# EAGLE board nRF52 Display (EAGLE 9.5.0)
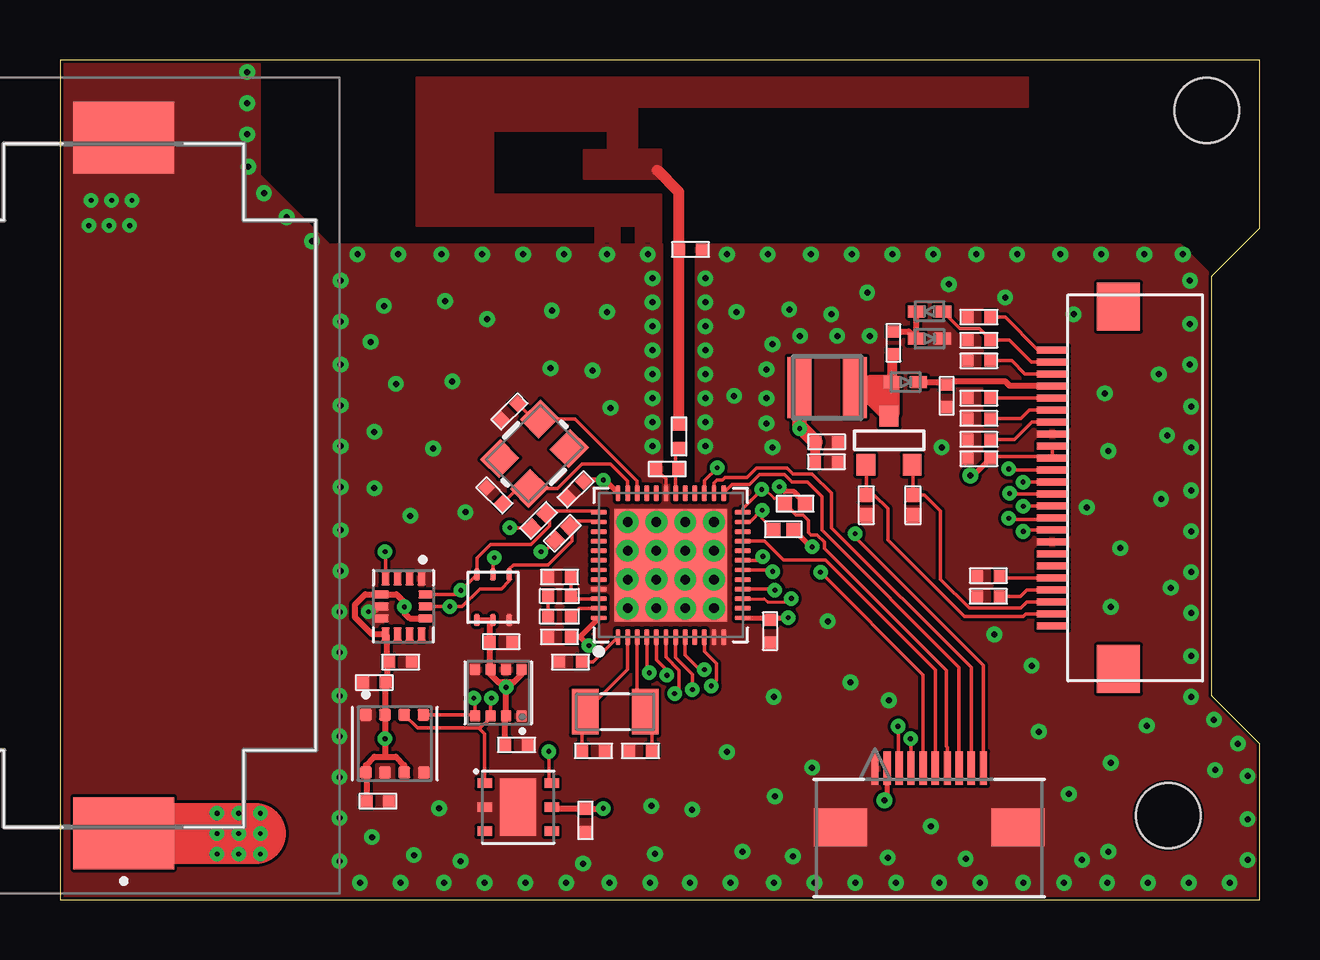
[diagram p0: board, top side]
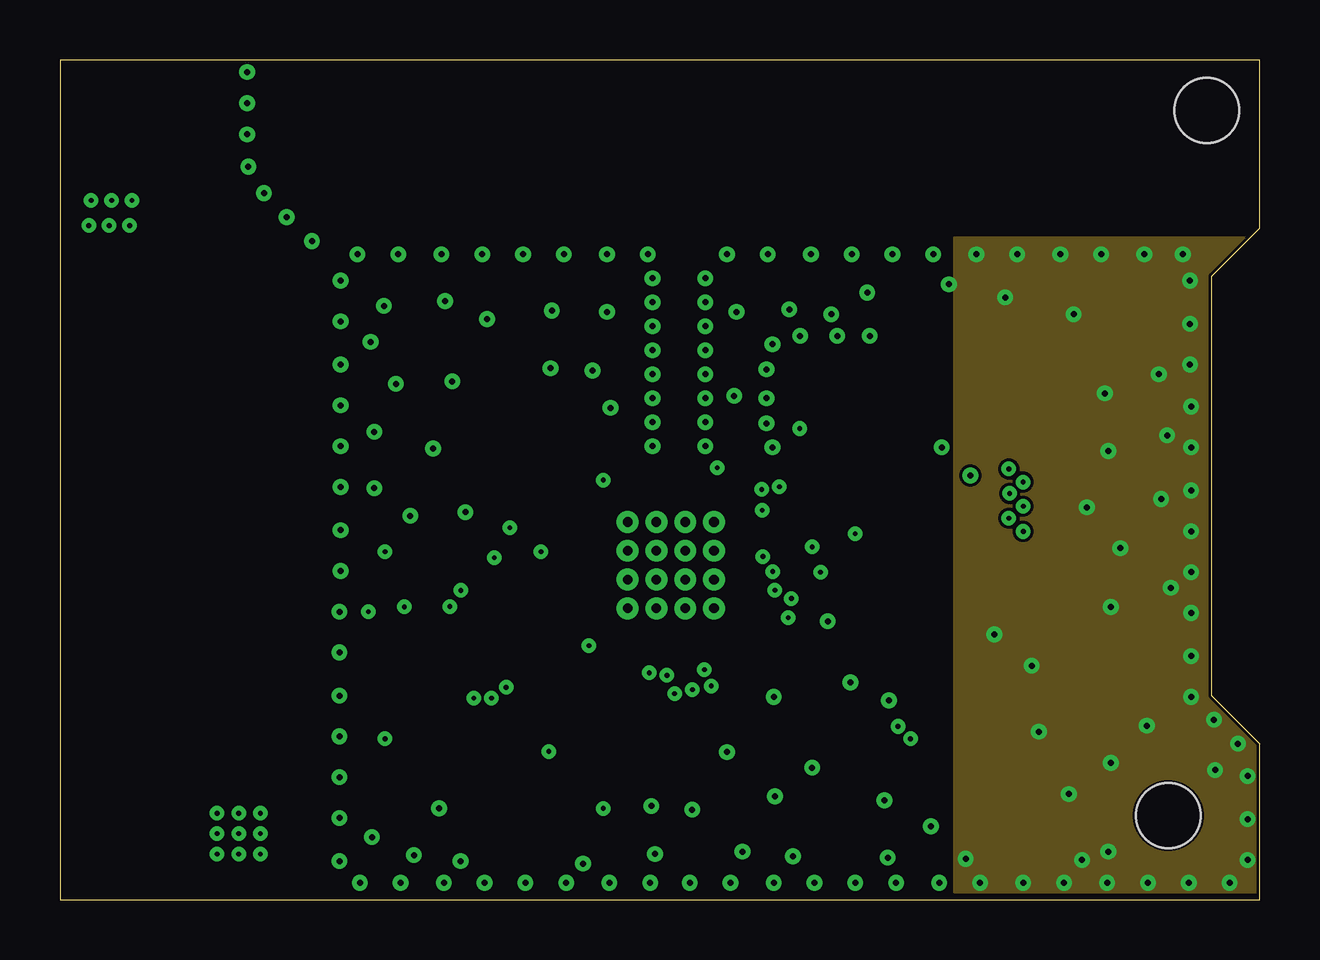
[diagram p1: board, inner layer Route2]
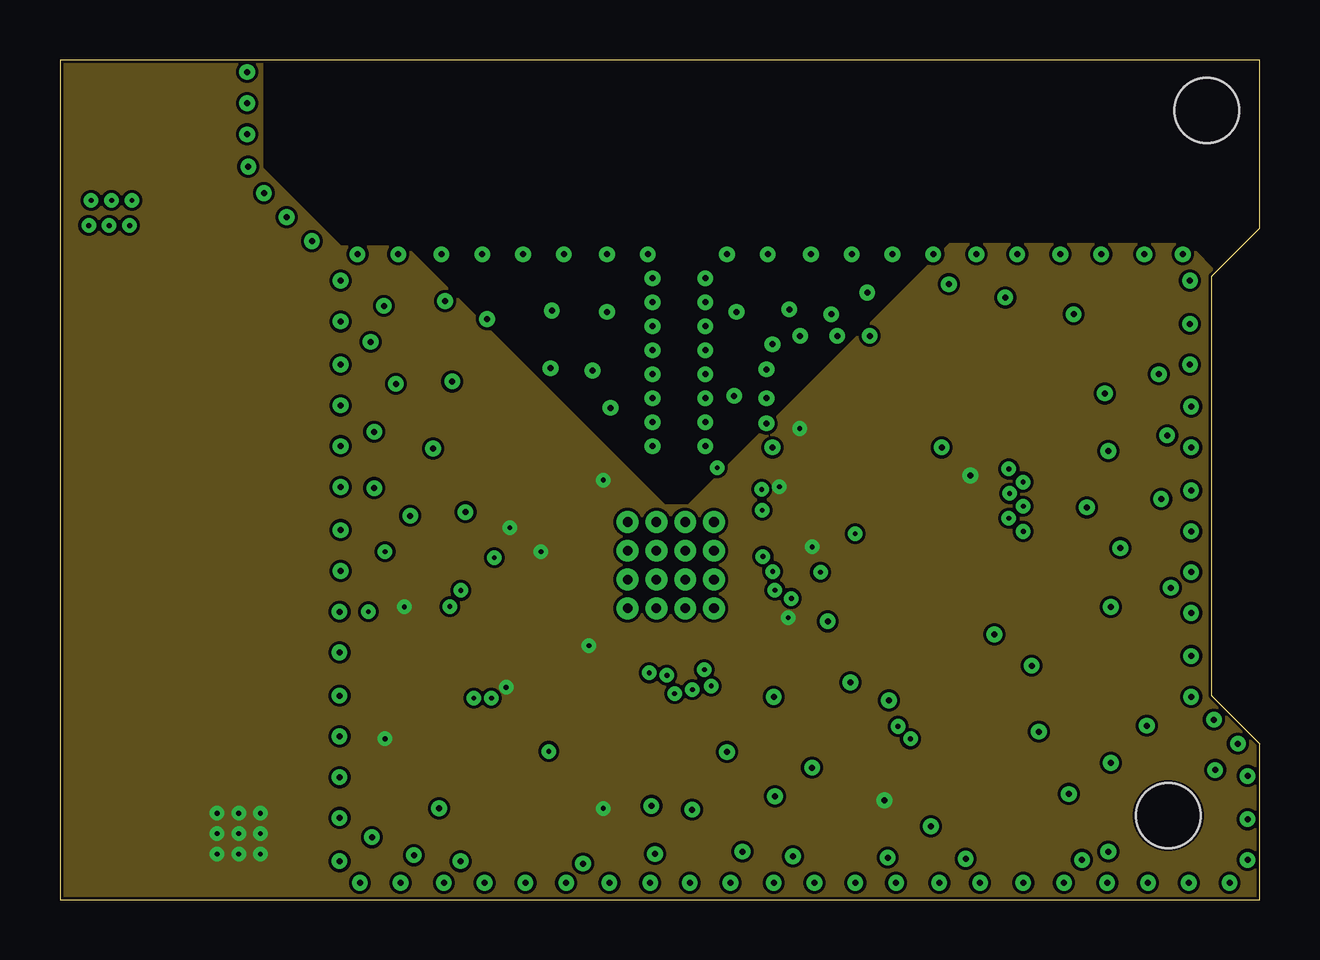
[diagram p2: board, inner layer Route15]
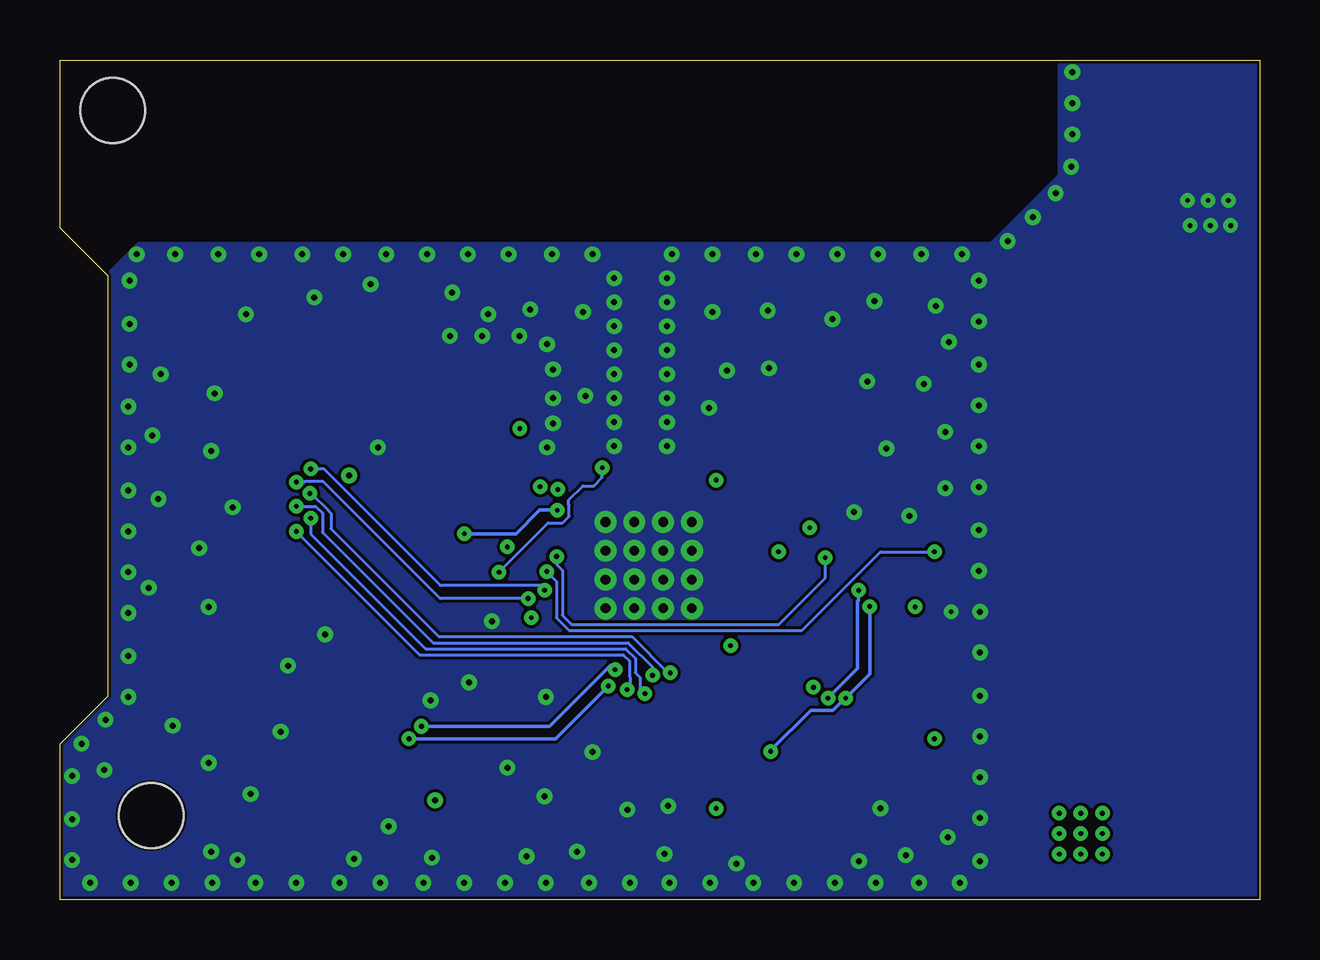
[diagram p3: board, bottom side, seen from below]

Size 50 x 35 mm. Coordinates in mm from the lower left corner, seen from the top.
Outline: 0,0 50,0 50,6.5 48,8.5 48,26 50,28 50,35 0,35 0,0
Copper layers (1+2*15+16): Top 0.035mm / dielectric 1.5mm / Route2 0.035mm / dielectric 0.15mm / Route15 0.035mm / dielectric 0.2mm / Bottom 0.035mm
Design rules "default *": minimum track width 5mil, minimum drill 0.2mm, track to track 5mil, track to pad 5mil, pad to pad 5mil, via to via 5mil, smd to smd 5mil, copper to edge 5mil, drill to drill 5mil, minimum pad ring 10mil, minimum via ring 8mil, stop-mask expansion 0mil, vias tented up to drill 40mil, thermal gap 0mil
Holes 2.7 mm at 46.2,3.5 47.8,32.9
tRestrict: area 25.1,17.4 to 26.4,27.4

## Footprints (pad centres in the part's own frame; a part is rotated, then mirrored left to right if it is on the bottom)
C0402 = smd 0.5 x 0.5: 1 -0.475,0; 2 0.475,0
SOD523 = smd 0.7 x 0.5: 1 0.55,0; 2 -0.55,0
687124149022 = smd 0.3 x 1.3: 1 -5.75,0; 2 -5.25,0; 3 -4.75,0; 4 -4.25,0; 5 -3.75,0; 6 -3.25,0; 7 -2.75,0; 8 -2.25,0; 9 -1.75,0; 10 -1.25,0; 11 -0.75,0; 12 -0.25,0; 13 0.25,0; 14 0.75,0; 15 1.25,0; 16 1.75,0; 17 2.25,0; 18 2.75,0; 19 3.25,0; 20 3.75,0; 21 4.25,0; 22 4.75,0; 23 5.25,0; 24 5.75,0 | smd 2 x 1.8: Z1 -7.55,-2.75; Z2 7.55,-2.75
INDC0402X26N = smd 0.5 x 0.5: 1 -0.732,0; 2 0.232,0
SM-NE29 = smd 1 x 2.54: 1 -1.15,0; 2 1.15,0
R0402 = smd 0.6 x 0.55: 1 -0.425,0; 2 0.425,0
SOT-23 = smd 0.787 x 0.889: 1 0.025,-1.016; 2 -0.94,1.016; 3 0.991,1.016
CR2032BS61 = smd 4.2 x 3: 1 0,14.5; 2 0,-14.5
PSON65P250X250X100-8N = smd 0.49 x 0.45: 1 0.97,0.975; 2 0.97,0.325; 3 0.97,-0.325; 4 0.97,-0.975; 5 -0.97,-0.975; 6 -0.97,-0.325; 7 -0.97,0.325; 8 -0.97,0.975
DFN300X300X110-7N = smd 0.6 x 0.4: 1 -1.4,1; 2 -1.4,0; 3 -1.4,-1; 4 1.4,-1; 5 1.4,0; 6 1.4,1 | smd 1.5 x 2.4: 7 0,0
MOLEX_52892-1095 = smd 0.305 x 1.397: 1 2.261,2.896; 2 1.753,2.896; 3 1.245,2.896; 4 0.762,2.896; 5 0.254,2.896; 6 -0.254,2.896; 7 -0.762,2.896; 8 -1.245,2.896; 9 -1.753,2.896; 10 -2.261,2.896 | smd 2.21 x 1.6: 11 -3.702,5.359; 12 3.702,5.359
PSON80P300X300X100-8N = smd 0.5 x 0.5: 1 1.2,1.2; 2 1.2,0.4; 3 1.2,-0.4; 4 1.2,-1.2; 5 -1.2,-1.22; 6 -1.2,-0.4; 7 -1.2,0.4; 8 -1.2,1.2
PQFN50P300X250X88-14N = smd 0.59 x 0.35: 1 -1.165,0.75; 2 -1.165,0.25; 3 -1.165,-0.25; 4 -1.165,-0.75; 8 1.165,-0.75; 9 1.165,-0.25; 10 1.165,0.25; 11 1.165,0.75 | smd 0.35 x 0.59: 5 -0.5,-0.915; 6 0,-0.915; 7 0.5,-0.915; 12 0.5,0.915; 13 0,0.915; 14 -0.5,0.915
QFN40P600X600X90-48_N = smd 0.65 x 0.2: 1 -3,2.2; 2 -3,1.8; 3 -3,1.4; 4 -3,1; 5 -3,0.6; 6 -3,0.2; 7 -3,-0.2; 8 -3,-0.6; 9 -3,-1; 10 -3,-1.4; 11 -3,-1.8; 12 -3,-2.2; 25 3,-2.2; 26 3,-1.8; 27 3,-1.4; 28 3,-1; 29 3,-0.6; 30 3,-0.2; 31 3,0.2; 32 3,0.6; 33 3,1; 34 3,1.4; 35 3,1.8; 36 3,2.2 | smd 0.2 x 0.65: 13 -2.2,-3; 14 -1.8,-3; 15 -1.4,-3; 16 -1,-3; 17 -0.6,-3; 18 -0.2,-3; 19 0.2,-3; 20 0.6,-3; 21 1,-3; 22 1.4,-3; 23 1.8,-3; 24 2.2,-3; 37 2.2,3; 38 1.8,3; 39 1.4,3; 40 1,3; 41 0.6,3; 42 0.2,3; 43 -0.2,3; 44 -0.6,3; 45 -1,3; 46 -1.4,3; 47 -1.8,3; 48 -2.2,3 | smd 4.7 x 4.7: PAD 0,0 | drill 0.4: PAD@VIA01 -1.8,1.8; PAD@VIA02 -1.8,0.6; PAD@VIA03 -1.8,-0.6; PAD@VIA04 -1.8,-1.8; PAD@VIA05 -0.6,1.8; PAD@VIA06 -0.6,0.6; PAD@VIA07 -0.6,-0.6; PAD@VIA08 -0.6,-1.8; PAD@VIA09 0.6,1.8; PAD@VIA10 0.6,0.6; PAD@VIA11 0.6,-0.6; PAD@VIA12 0.6,-1.8; PAD@VIA13 1.8,1.8; PAD@VIA14 1.8,0.6; PAD@VIA15 1.8,-0.6; PAD@VIA16 1.8,-1.8
TI-OPT3001 = smd 0.5 x 0.25: 1 -0.95,0.675; 2 -0.95,0; 3 -0.95,-0.675; 4 0.95,-0.675; 5 0.95,0; 6 0.95,0.675
ABS07-32.768KHZ-T = smd 1.1 x 1.9: 1 -1.25,0; 2 1.25,0
CRYSTAL-SMD-3.2X2.5MM = smd 1.2 x 1.1: 1 -1.175,-0.875; 2 1.175,-0.875; 3 1.175,0.875; 4 -1.175,0.875

## Placement (x,y rotation side)
C1  12pF  [C0402]  22.24,6.2 0 top
C2  12pF  [C0402]  24.2,6.2 180 top
C3  12p  [C0402]  18.11,16.85 135 top
C4  12p  [C0402]  18.73,20.35 225 top
C5  10u  [C0402]  21.28,9.9 0 top
C6  4.7u  [C0402]  21.49,17.1 45 top
C7  100n  [C0402]  31.95,18.25 180 top
C8  0.8p  [C0402]  25.31,17.95 0 top
C9  1.2p  [C0402]  26.28,27.1 180 top
C10  1u  [C0402]  20.82,13.45 180 top
C11  100n  [C0402]  29.6,11.19 90 top
C12  100n  [C0402]  14.2,9.9 180 top
C13  100n  [C0402]  18.39,10.75 180 top
C14  100u  [C0402]  19.03,6.45 180 top
C15  1u  [C0402]  38.3,24.28 0 top
C16  1u  [C0402]  38.3,23.32 0 top
C17  100n  [C0402]  20.82,10.95 180 top
C18  1u  [C0402]  38.3,22.46 0 top
C19  1u  [C0402]  38.3,20.9 0 top
C20  1u  [C0402]  38.3,20.06 0 top
C21  1u  [C0402]  38.3,19.18 0 top
C22  1u  [C0402]  36.96,21 270 top
C23  1u  [C0402]  38.3,18.38 0 top
C24  1u  [C0402]  38.7,12.64 0 top
C25  1u  [C0402]  38.7,13.5 0 top
C26  4.7u  [C0402]  31.96,19.08 0 top
C27  4.7u  [C0402]  34.74,23.21 270 top
C28  1u  [C0402]  13.25,4.1 0 top
C29  1u  [C0402]  13.1,9.05 180 top
C30  100n  [C0402]  21.9,3.3 270 top
D1  1PS79SB30,115  [SOD523]  36.25,24.52 180 top
D2  1PS79SB30,115  [SOD523]  36.24,23.38 0 top
D3  1PS79SB30,115  [SOD523]  35.24,21.57 0 top
K1  687124149022  [687124149022]  41.37,17.16 90 top
L1  3.9u  [INDC0402X26N]  25.8,19.56 90 top
L2  [SM-NE29]  31.98,21.35 0 top
L4  10u  [INDC0402X26N]  21.07,11.8 0 top
L5  15n  [INDC0402X26N]  20.57,12.65 180 top
R1  10K  [R0402]  30.64,16.5 0 top
R2  4.7k  [R0402]  19.95,15.8 225 top
R3  4.7k  [R0402]  20.94,15.27 225 top
R4  10K  [R0402]  30.15,15.43 0 top
R5  10k  [R0402]  33.61,16.44 90 top
R6  0.47  [R0402]  35.55,16.44 90 top
T1  [SOT-23]  34.58,19.14 180 top
U1  CR2032-BS-6-1  [CR2032BS61]  2.66,17.27 180 top
U2  BME280  [PSON65P250X250X100-8N]  18.27,8.62 270 top
U4  SHT20  [DFN300X300X110-7N]  19.1,3.85 0 top
U5  52892-1095  [MOLEX_52892-1095]  36.23,8.37 180 top
U6  BME680  [PSON80P300X300X100-8N]  13.95,6.5 90 top
U7  BMI160  [PQFN50P300X250X88-14N]  14.32,12.22 270 top
U$1  NRF52832  [QFN40P600X600X90-48_N]  25.46,13.94 90 top
U$2  TI-OPT3001  [TI-OPT3001]  18.05,12.6 90 top
X1  ABS07-32.768KHZ-T  [ABS07-32.768KHZ-T]  23.14,7.83 180 top
Y1  CRYSTAL-26MHZSMD-3.2X2.5  [CRYSTAL-SMD-3.2X2.5MM]  19.78,18.59 225 top

## Library data of the parts
C1-C30 = eagle-ltspice; SPICEMODEL: NONE; SPICEPREFIX: C
D1-D3 = 1PS79SB30_115; AVAILABILITY: Unavailable; DESCRIPTION: 1PS79SB30 Series 40 V 200 mA Surface Mount Schottky Barrier Diode - SOD-523; MF: Nexperia; MP: 1PS79SB30,115; PACKAGE: SOD-523 Nexperia; PRICE: None
K1 = 687124149022; AVAILABILITY: Unavailable; DESCRIPTION: FFC / FPC Board Connector, WR-FPC Series, Surface Mount, Receptacle, 24, Bottom, 0.5 mm; MF: Wurth Electronics; MP: 687124149022; PACKAGE: None; PRICE: None
L1 L4 L5 = MHQ0402P7N5JT000; AVAILABILITY: Unavailable; DESCRIPTION: FIXED IND 7.5NH 200MA 1.2 OHM; MF: TDK; MP: MHQ0402P7N5JT000; PACKAGE: 0402 TDK; PRICE: None
L2 = inductor-neosid; OC_FARNELL: unknown; OC_NEWARK: unknown
R1-R6 = eagle-ltspice; SPICEMODEL: NONE; SPICEPREFIX: R
T1 = zetex; OC_FARNELL: unknown; OC_NEWARK: unknown
U1 = CR2032-BS-6-1; DESCRIPTION: Battery Holders, Clips & Contacts SMD RoHS; HEIGHT: 6mm; MANUFACTURER_NAME: Q&J; MANUFACTURER_PART_NUMBER: CR2032-BS-6-1
U2 = BME280; AVAILABILITY: Unavailable; DESCRIPTION: Integrated pressure, humidity and temperature sensor; 8-pin 2.5x2.5x0.93mm LGA; MF: Bosch; MP: BME280; PACKAGE: LGA-8 Bosch; PRICE: None
U4 = SHT20; AVAILABILITY: Unavailable; DESCRIPTION: SHT20 3.6 V -40 to +125°C Fully Calibrated Digital Humidity & Temperature Sensor; MF: Sensirion AG; MP: SHT20; PACKAGE: DFN-6 Sensirion; PRICE: None
U5 = 52892-1095; AVAILABILITY: Unavailable; DESCRIPTION: Socket, r/a, Fpc, Zif, Smt, 10way; MF: Molex; MP: 52892-1095; PACKAGE: None; PRICE: None
U6 = BME680; AVAILABILITY: Unavailable; DESCRIPTION: Integrated Environmental Unit; MF: Bosch Sensortec; MP: BME680; PACKAGE: LGA-8 Bosch Tools; PRICE: None
U7 = BMI160; AVAILABILITY: Unavailable; DESCRIPTION: BMI160 2.5 x 3 mm Tiaxial Accelerometer / Gyroscope Inertial Measurement Unit; MF: Bosch; MP: BMI160; PACKAGE: LGA-14 Bosch; PRICE: None
U$1 = Nordic_nRF
U$2 = FaBo-Mems
X1 = Crystals; CREATED_BY: PCBLayout.com; DIGIKEY_PART_NUMBER: 535-9542-2-ND; MANUFACTURER: Abracon LLC; MPN: ABS07-32.768KHZ-T; PACKAGE: SMD-2
Y1 = SparkFun-Clocks; PROD_ID: XTAL-12454

## Nets
BUSY: K1.9 U$1.7
CS: K1.12 U$1.4
D/C: K1.11 U$1.5
DFU: R4.1 U5.10 U$1.23
FRST: U5.5 U$1.27
GDR: K1.2 R5.2 T1.3
GND: C1.2 C2.2 C3.2 C4.2 C5.1 C6.1 C7.1 C8.1 C9.1 C10.2 C11.1 C12.1 C13.1 C14.1 C15.1 C16.1 C17.2 C18.1 C19.1 C20.1 C21.1 C22.2 C23.1 C24.1 C25.1 C26.2 C28.2 C29.2 C30.2 D2.1 K1.8 K1.17 R5.1 R6.1 U1.2 U2.1 U2.5 U2.7 U4.2 U4.7 U5.1 U5.11 U5.12 U6.1 U6.5 U6.7 U7.1 U7.6 U7.7 U$1.11 U$1.12 U$1.31 U$1.45 U$1.PAD U$1.PAD@VIA01 U$1.PAD@VIA02 U$1.PAD@VIA03 U$1.PAD@VIA04 U$1.PAD@VIA05 U$1.PAD@VIA06 U$1.PAD@VIA07 U$1.PAD@VIA08 U$1.PAD@VIA09 U$1.PAD@VIA10 U$1.PAD@VIA11 U$1.PAD@VIA12 U$1.PAD@VIA13 U$1.PAD@VIA14 U$1.PAD@VIA15 U$1.PAD@VIA16 U$2.3
INT_BMI: U7.4 U$1.18
INT_OPT: U$1.19 U$2.5
MISO: U$1.17
MOSI: K1.14 U$1.16
N$1: C1.1 U$1.2 X1.2
N$2: C2.1 U$1.3 X1.1
N$3: C3.1 U$1.35 Y1.3
N$4: C4.1 U$1.34 Y1.1
N$5: C5.2 U$1.1
N$6: C8.2 L1.1 U$1.30
N$7: C27.2 D3.2 L2.2 T1.1
N$8: C21.2 K1.18
N$9: L4.2 U$1.47
N$10: L4.1 L5.2
N$11: C10.1 L5.1 U$1.46
N$12: C18.2 K1.22
N$13: C20.2 K1.19
N$14: C19.2 K1.20
N$16: C15.2 K1.24
N$19: C24.2 K1.4
N$20: C25.2 K1.5
N$22: C27.1 D1.1 D2.2
NRESET: R1.1 U5.7 U$1.24
PREVGH: C22.1 D3.1 K1.21
PREVGL: C16.2 D1.2 K1.23
RES: K1.10 U$1.6
RESE: K1.3 R6.2 T1.2
RF: C9.2 L1.2
RX: U5.4 U$1.10
SCK: K1.13 U$1.15
SCL: R3.1 U2.4 U4.6 U6.4 U7.13 U$1.38 U$2.4
SDA: R2.1 U2.3 U4.1 U6.3 U7.14 U$1.37 U$2.6
SWDCLK: U5.8 U$1.25
SWDIO: U5.9 U$1.26
SWO: U5.6 U$1.21
TX: U5.3 U$1.8
VDD: C6.2 C7.2 C11.2 C12.2 C13.2 C14.2 C17.1 C23.2 C26.1 C28.1 C29.1 C30.1 K1.15 K1.16 L2.1 R1.2 R2.2 R3.2 R4.2 U1.1 U2.2 U2.6 U2.8 U4.5 U5.2 U6.2 U6.6 U6.8 U7.5 U7.8 U7.12 U$1.13 U$1.36 U$1.48 U$2.1 U$2.2

## Tracks (layer width: path | path; a pad name or v marks a point on that pad's centre or on a via)
BUSY  (via drill 0.2)
  Top 0.15: U$1.7 25.66,10.1 26.36,9.4 v26.36,8.75 | K1.9 40.22,15.41 v40.15,15.35
  Bottom 0.127: v26.36,8.75 26.25,8.86 26.25,9.29 26.27,9.31 26.27,9.94 26.53,10.2 35.01,10.2 v40.15,15.35
CS  (via drill 0.2)
  Top 0.15: U$1.4 24.46,9.56 v24.57,9.45 | K1.12 39.61,16.9 v39.58,16.93
  Bottom 0.127: v39.58,16.93 39.52,16.93 38.8,16.21 38.8,16.2 38.7,16.1 38.7,15.45 34.21,10.96 26.16,10.96 24.65,9.45 v24.57,9.45
D/C  (via drill 0.2)
  Top 0.15: U$1.5 24.86,9.99 25.3,9.55 v25.3,9.35 | K1.11 40.17,16.41 v40.15,16.39
  Bottom 0.127: v25.3,9.35 25.3,9.69 26.32,10.71 34.46,10.71 39.06,15.31 39.06,16.11 39.35,16.39 v40.15,16.39
DFU  (via drill 0.2)
  Top 0.127: R4.1 29.27,15.89 v29.27,16.23
  Top 0.15: U$1.23 28.75,15.74 29.25,16.23 v29.27,16.23 | v33.15,15.25 33.15,15.1 38.49,9.76 U5.10
  Bottom 0.15: v33.15,15.25 31,15.25 30.02,16.23 v29.27,16.23
FRST  (via drill 0.2)
  Top 0.15: U$1.27 26.86,17.46 v27.4,18 | v31.7,13.65 35.98,9.37 U5.5
  Bottom 0.127: v31.7,13.65 29.65,15.7 29.05,15.7 28.77,15.98 28.77,16.44 28.8,16.46 28.8,16.65 28.2,17.25 27.75,17.25 27.4,17.6 v27.4,18
GDR
  Top 0.15: T1.3 33.61,18.1 R5.2 33.94,16.87 34.5,16.3 34.5,15 37.7,11.8 40.15,11.8 40.26,11.91 K1.2
GND  (via drill 0.2, 0.25)
  Top 0.127: U$1.PAD@VIA10 U$1.PAD@VIA14 | U$1.PAD 25.46,15.14 U$1.PAD@VIA15 | U$1.PAD@VIA11 U$1.PAD@VIA16 | U$1.PAD@VIA11 U$1.PAD@VIA12 | U$1.PAD U$1.PAD@VIA11 | U$1.PAD U$1.PAD@VIA10 | U$1.PAD@VIA10 U$1.PAD@VIA09 | U$1.PAD 24.26,13.94 U$1.PAD@VIA05 | U$1.PAD U$1.PAD@VIA06 | U$1.PAD 26.66,13.94 U$1.PAD@VIA08 | U$1.PAD@VIA07 U$1.PAD@VIA04 | U$1.PAD U$1.PAD@VIA07 | U$1.PAD@VIA07 U$1.PAD@VIA03 | U$1.PAD 25.46,12.74 U$1.PAD@VIA02 | U$1.PAD U$1.PAD@VIA01 | U7.6 13.19,12 v12.85,12
  Top 0.15: U$1.31 25.26,17.53 C8.1
  other vias: 22.8,26.9 24.5,26.9 15.9,26.9 17.6,26.9 12.4,26.9 14.1,26.9 19.3,26.9 21,26.9 43.4,26.9 41.7,26.9 45.2,26.9 38.2,26.9 39.9,26.9 31.3,26.9 33,26.9 27.8,26.9 29.5,26.9 34.7,26.9 36.4,26.9 24.7,25.9 24.7,24.9 24.7,23.9 24.7,22.9 24.7,21.9 24.7,20.9 24.7,19.9 24.7,18.9 26.9,24.9 26.9,23.9 26.9,22.9 26.9,21.9 26.9,20.9 26.9,19.9 26.9,18.9 26.9,25.9 16.7,1.6 14.75,1.85 13,2.6 15.8,3.8 21.8,1.5 24.8,1.9 26.35,3.75 24.65,3.9 27.8,6.15 29.8,4.3 28.45,2 34.5,1.75 30.55,1.8 31.35,5.5 36.3,3.05 42.6,1.65 37.75,1.7 34.55,8.3 29.75,8.45 32.95,9.05 43.7,2 48.15,5.4 42.05,4.4 43.8,5.7 45.3,7.25 48.1,7.5 40.8,7 38.95,11.05 43.8,12.2 40.5,9.75 46.8,26.9 46.3,13 44.2,14.65 42.8,16.35 45.9,16.7 32,11.6 36.75,18.85 29.7,18.85 28.1,21 43.7,18.7 46.15,19.35 43.55,21.1 45.8,21.9 42.25,24.4 39.4,25.1 37.05,25.65 33.65,25.3 32.15,24.4 30.4,24.6 28.2,24.5 14.6,16 16.9,16.15 13.1,17.15 15.55,18.8 13.1,19.5 16.35,21.6 22.95,20.5 22.2,22.05 20.45,22.15 22.8,24.5 20.5,24.55 17.8,24.2 16.05,24.95 13.5,24.75 14,21.5 12.95,23.25 1.3,29.15 2.15,29.15 3,29.15 1.2,28.1 2.05,28.1 2.9,28.1 7.8,34.5 7.8,33.2 7.8,31.9 7.85,30.55 10.5,27.45 9.45,28.45 8.5,29.45 11.65,10.3 11.65,12 11.65,3.4 11.65,5.1 11.65,1.6 11.65,6.8 11.65,8.5 11.7,24.1 11.7,25.8 11.7,17.2 11.7,18.9 11.7,13.7 11.7,15.4 11.7,20.6 11.7,22.3 43.65,0.7 45.35,0.7 40.15,0.7 41.85,0.7 47.05,0.7 48.75,0.7 36.65,0.7 38.35,0.7 29.75,0.7 31.45,0.7 26.25,0.7 27.95,0.7 33.15,0.7 34.85,0.7 22.9,0.7 24.6,0.7 16,0.7 17.7,0.7 12.5,0.7 14.2,0.7 19.4,0.7 21.1,0.7 49.1,6.5 49.5,5.15 49.5,1.65 49.5,3.35 47.15,18.85 47.15,20.55 47.15,11.95 47.15,13.65 47.15,8.45 47.15,10.15 47.15,15.35 47.15,17.05 47.1,25.8 47.1,22.3 47.1,24 29.45,19.85 29.45,20.9 29.45,22.1 29.7,23.15 30.85,23.5 32.4,23.5 33.75,23.5
  pour Top: 11.3,27.3 46.7,27.3 48,26 48,8.6 50.1,6.5 50.1,0 11.3,0
  pour Route2: 37.3,27.6 72.7,27.6 74,26.3 74,8.9 76.1,6.8 76.1,0.3 37.3,0.3
  pour Top: 11.6,26.9 8.3,30.2 8.3,34.95 -1.15,34.95 -1.15,0.05 11.35,0.05 11.6,0.3
  pour Bottom: 50.05,0.15 -1.1,0.15 -1.1,34.95 8.35,34.95 8.35,30.2 11.2,27.35 46.75,27.35 48,26.1 48,8.6 50.05,6.55
INT_BMI  (via drill 0.2)
  Top 0.15: U7.4 13.57,14.48 v13.55,14.5 | U$1.18 29.65,13.74 v29.71,13.68
  Bottom 0.127: v13.55,14.5 15.8,14.5 19.08,11.22 28.77,11.22 29.31,11.75 29.31,13.27 v29.71,13.68
INT_OPT  (via drill 0.2)
  Top 0.15: U$2.5 18.05,14.2 v18.1,14.25 | U$1.19 29.14,14.14 v29.3,14.3
  Bottom 0.127: v29.3,14.3 29.3,13.96 29.05,13.71 29.05,11.85 28.67,11.47 20.03,11.47 18.1,13.4 v18.1,14.25
MOSI  (via drill 0.2)
  Top 0.15: U$1.16 29.8,12.94 v29.8,12.9 | K1.14 39.59,17.91 v39.55,17.95
  Bottom 0.127: v29.8,12.9 29.8,13.02 29.88,13.09 34.14,13.09 39,17.95 v39.55,17.95
N$1
  Top 0.15: U$1.2 23.66,9.6 X1.2 21.75,7.69 21.75,7.45 21.77,7.43 C1.1
N$2
  Top 0.15: U$1.3 24.06,8.16 X1.1 24.68,7.54 C2.1
N$3
  Top 0.15: U$1.35 23.66,17.44 22.95,18.15 21.75,18.15 20.74,17.14 Y1.3
  Top 0.152: Y1.3 19.07,17.14 C3.1
N$4
  Top 0.15: U$1.34 24.05,17.45 21.46,20.04 Y1.1
  Top 0.152: Y1.1 19.71,20.04 C4.1
N$5
  Top 0.15: C5.2 22.22,9.9 U$1.1
N$6
  Top 0.15: L1.1 25.65,18.68 25.65,18.09 C8.2 25.66,17.82 U$1.30
N$7
  Top 0.406: 34.69,20.29 T1.1 | D3.2 34.69,22.69 C27.2
  Top 0.61: T1.1 33.46,21.25 33.56,21.35 | 33.56,21.35 L2.2 | 33.82,21.57 D3.2 34.69,20.7 | 33.56,21.35 33.78,21.57 33.82,21.57 | 34.69,20.7 34.69,20.29 | 34.69,20.7 33.82,21.57
N$8
  Top 0.15: C21.2 39.78,19.18 40.51,19.91 K1.18
N$9
  Top 0.15: L4.2 21.64,12.14 U$1.47
N$10
  Top 0.15: L4.1 L5.2
N$11
  Top 0.15: U$1.46 21.41,12.54 L5.1 C10.1
N$12
  Top 0.15: C18.2 39.67,22.46 40.23,21.91 K1.22
N$13
  Top 0.15: K1.19 40.41,20.41 40.06,20.06 C20.2
N$14
  Top 0.15: C19.2 K1.20
N$16
  Top 0.15: K1.24 40.77,22.91 39.4,24.28 C15.2
N$19
  Top 0.15: C24.2 40.04,12.64 40.31,12.91 K1.4
N$20
  Top 0.15: K1.5 39.27,13.41 C25.2
N$22
  Top 0.254: C27.1 35.38,23.69 D2.2 D1.1
NRESET  (via drill 0.2)
  Top 0.127: R1.1 30,16.71 29.78,16.71 29.39,17.1 v29.25,17.1
  Top 0.15: v29.25,17.1 28.46,16.31 U$1.24 | 36.95,5.52 U5.7 36.99,6.34 36.95,6.39 36.95,9.56 31.85,14.65 31.85,14.91 31.56,15.21 31.3,15.21 31.2,15.3 31.2,15.8 30.98,16.02 30.68,16.02 30.56,16.14 30.56,16.15 R1.1
PREVGH
  Top 0.254: K1.21 39.59,21.41 39.4,21.6 37.09,21.6 37.05,21.57 | 37.05,21.57 C22.1 | D3.1 37.05,21.57
PREVGL
  Top 0.15: C16.2 38.8,23.32 | 38.8,23.32 39.58,23.32 40.49,22.41 K1.23 | D1.2 37.37,23.95 37.52,23.8 38.32,23.8 38.8,23.32
RES  (via drill 0.2)
  Top 0.15: v25.62,8.58 25.8,8.77 25.8,9.56 25.26,10.11 U$1.6 | K1.10 41.36,15.86 41.35,15.85 39.6,15.85 v39.55,15.9
  Bottom 0.127: v39.55,15.9 39.55,15.25 34.75,10.45 26.42,10.45 26.01,10.04 26.01,9.45 25.82,9.25 25.82,8.78 v25.62,8.58
RESE
  Top 0.15: T1.2 35.55,18.09 R6.2 36.03,16.87 36.7,16.2 36.7,13.35 37.9,12.15 40.05,12.15 40.31,12.41 K1.3
RF
  Top 0.127: 25.8,26.6 C9.2
  Top 0.46: 24.9,30.4 25.8,29.5 25.8,26.6 L1.2
  pour Top: 14.87,28.1 14.87,34.27 40.35,34.27 40.35,33.06 24.05,33.06 24.05,31.26 25.06,31.26 25.06,30.05 21.84,30.05 21.84,31.25 22.85,31.25 22.85,32.06 18.05,32.06 18.05,29.39 25.05,29.39 25.05,27.36 24.01,27.36 24.01,28.1 23.32,28.1 23.32,27.36 22.33,27.36 22.33,28.1
RX  (via drill 0.2)
  Top 0.15: U$1.10 26.86,10.35 27.37,9.84 27.37,9.13 v27.14,8.9 | U5.4 35.47,6.68 v35.45,6.7
  Bottom 0.15: v35.45,6.7 29.34,6.7 v27.14,8.9
SCK  (via drill 0.2)
  Top 0.127: U$1.15 29.36,12.54 29.5,12.41 30.48,12.41
  Top 0.15: 30.48,12.41 v30.48,12.55 | K1.13 v40.14,17.41
  Bottom 0.127: v30.48,12.55 34.15,12.55 39.02,17.42 39.78,17.42 39.8,17.41 v40.14,17.41
SCL  (via drill 0.2)
  Top 0.15: U$1.38 22.41,15.79 21.51,15.79 21.29,15.57 | 21.29,15.57 21.24,15.52 21.35,15.41 21.35,14.95 20.35,13.95 18.9,13.95 18.73,13.78 U$2.4 18.73,13.28 18.4,12.95 17.5,12.95 16.77,12.22 v16.25,12.22 | 21.29,15.57 R3.1 | v17.25,8.4 17.3,8.36 U2.4 17.25,7.7 U6.4 | v20.38,6.17 20.38,4.97 U4.6 | v16.25,12.22 U7.13 v16.25,12.22 v16.25,12.21 v16.25,12.22
  Bottom 0.15: v16.25,12.21 16.25,9.4 v17.25,8.4 17.27,8.4 17.77,7.89 18.7,7.89 20.4,6.2 v20.38,6.17
SDA  (via drill 0.2)
  Top 0.15: U$1.37 22.41,16.19 20.34,16.19 R2.1 20.4,15.95 20.4,15.56 19.64,14.81 17.94,14.81 17.38,14.24 U$2.6 v16.71,12.89 16.55,12.72 U7.14 | v17.98,8.4 17.95,8.36 U2.3 17.95,7.58 17.52,7.15 17.45,7.15 | U6.3 14.9,7.15 17.45,7.15 | U4.1 17.7,6.9 17.45,7.15
  Bottom 0.15: v16.71,12.89 16.71,12.47 16.75,12.42 16.75,9.63 v17.98,8.4
SWDCLK
  Top 0.15: U$1.25 28.02,17.3 28.73,17.3 29.15,17.71 30.19,17.71 30.5,17.4 31.15,17.4 31.75,16.8 31.75,15.41 37.48,9.68 U5.8
SWDIO
  Top 0.15: U$1.26 27.26,17.36 27.39,17.5 27.61,17.5 27.71,17.6 28.64,17.6 29.03,17.99 30.31,17.99 30.55,17.75 31.35,17.75 32.15,16.95 32.15,15.5 37.98,9.67 U5.9
SWO
  Top 0.15: U5.6 36.48,9.58 31.91,14.16 30.16,14.16 29.36,14.95 U$1.21
TX  (via drill 0.2)
  Top 0.15: U$1.8 26.06,10.19 26.66,9.59 v26.86,9.59 | U5.3 34.95,5.51 34.95,7.21 v34.93,7.22
  Bottom 0.15: v26.86,9.59 26.86,9.74 26.88,9.76 27.05,9.76 29.59,7.22 v34.93,7.22
VDD  (via drill 0.2, 0.25)
  Top 0.15: C23.2 38.85,18.46 41.32,18.46 K1.15 K1.16 | R3.2 20.17,14.5 v20.05,14.5 | R2.2 v18.75,15.5 | v8.35,2.75 8.15,2.75
  Top 0.2: U5.2 34.48,4.39 34.37,4.28 v34.37,4.13 | U$2.2 U$2.1
  Top 0.203: U$1.36 22.71,17.49 v22.65,17.49 21.88,17.49 C6.2 | U$1.13 29.52,11.74 C11.2 29.68,11.75 v30.35,11.75 | R4.2 31.3,14.7 v31.35,14.7 | v29.98,17.21 30.18,17 30.61,17 30.74,16.87 30.74,16.82 R1.2 | C17.1 21.67,10.95 | U$1.48 21.67,10.95 | 21.67,10.95 21.68,10.95 v22.05,10.58 | C23.2 38.07,17.68 v37.95,17.68
  Top 0.254: U$2.2 17.91,11.52 C13.2 17.91,9.62 U2.6 17.89,9.54 17.89,9.44 18.29,9.05 18.6,9.05 | U2.8 19.25,9.4 18.9,9.05 18.6,9.05 | 18.6,9.05 18.59,9.04 v18.59,8.85 U2.2 18.55,7.61 C14.2 | U4.5 20.57,3.77 C30.1 22.62,3.77 v22.65,3.8 | C28.1 12.78,5.27 U6.8 12.75,5.6 13.1,5.95 13.55,5.95 | 13.55,5.95 14,5.95 14.35,5.6 U6.6 | U7.12 14.58,11.72 14.35,11.95 v14.35,12.2 14.35,12.4 14.03,12.72 U7.5 12.72,12.72 12.29,12.29 12.29,11.77 13.01,11.06 U7.8 13.62,11.01 13.62,10.01 C12.2 13.72,9.8 13.62,9.7 13.62,9.1 C29.1 13.55,9.03 U6.2 13.55,5.95
  Top 0.305: L2.1 30.7,21.48
  Top 0.406: C7.2 C26.1
  Top 0.61: C26.1 30.93,19.64 v30.83,19.64 L2.1
  Top 2.54: 2.56,2.87 U1.1 2.68,2.75 8.15,2.75
  other vias: 13.55,6.7 7.45,3.6 8.35,3.6 6.55,3.6 7.45,2.75 6.55,2.75 7.45,1.9 8.35,1.9 6.55,1.9
  pour Route15: 37.35,5.25 32.35,5.25 31.4,4.3 31.4,1.4 32.25,0.55 37.65,0.55 37.65,4.95
  pour Route15: 25.2,16.4 14.4,27.2 11.7,27.2 8.4,30.5 8.4,34.9 -0.2,34.9 -0.2,0.1 0,-0.1 50,-0.1 50,6.8 48.3,8.5 48.3,26 47,27.3 41,27.3 37.1,27.3 26.2,16.4